# EAGLE board motor (EAGLE 9.7.0)

Size 147.61 x 58.24 mm. Coordinates in mm from the lower left corner, seen from the top.
Outline: 0,0 147.62,0 147.62,58.24 0,58.24 0,0
Copper layers (1*16): Top 0.035mm / dielectric 1.5mm / Bottom 0.035mm
Design rules "default": minimum track width 6mil, minimum drill 0.35mm, track to track 6mil, track to pad 6mil, pad to pad 6mil, via to via 6mil, smd to smd 6mil, copper to edge 40mil, drill to drill 6mil, minimum pad ring 10mil, minimum via ring 8mil, stop-mask expansion 4mil, vias tented up to drill 0mil, thermal gap 10mil

## Footprints (pad centres in the part's own frame; a part is rotated, then mirrored left to right if it is on the bottom)
BATTERY-GENERIC = drill 1.118 pad 3.15 octagon: + 2.54,0; - -2.54,0
MOTOR = drill 1.118 pad 3.15 octagon: + 2.54,0; - -2.54,0
SWITCH-SPDT-PTH-8.5X3.7MM = drill 1.016 pad 1.88: 1 -2.54,0; 2 0,0; 3 2.54,0
TO92 = drill 0.813 octagon: 1 -1.27,0; 2 0,1.905; 3 1.27,0

## Placement (x,y rotation side)
BAT1  9V  [BATTERY-GENERIC]  139.36,44.86 180 top
M1  MOTOR_HDR  [MOTOR]  8.26,27.72 0 top
S1  TOGGLE  [SWITCH-SPDT-PTH-8.5X3.7MM]  72.06,51.25 0 top
T1  NPN  [TO92]  98.6,22.61 0 top
T2  NPN  [TO92]  47.8,22.61 0 top
T3  NPN  [TO92]  47.8,4.83 0 top
T4  NPN  [TO92]  98.6,4.83 0 top

## Library data of the parts
BAT1 M1 S1 = Tinkercad
T1-T4 = Tinkercad; CATEGORY: Transistor; SUB-CATEGORY: BJT; TYPE: NPN

## Nets
BAT1+: BAT1.+ S1.2 T1.1 T2.1
BAT1-: BAT1.- T3.3 T4.3
M1_+: M1.+ T1.3 T4.1
M1_-: M1.- T2.3 T3.1
S1_O: S1.1 T1.2 T3.2
S1_S: S1.3 T2.2 T4.2

## Tracks (layer width: path | path; a pad name or v marks a point on that pad's centre or on a via)
BAT1+  (3 unrouted)
BAT1-  (2 unrouted)
M1_+  (2 unrouted)
M1_-  (2 unrouted)
S1_O  (2 unrouted)
S1_S  (2 unrouted)